# Allegro board Sensor.brd
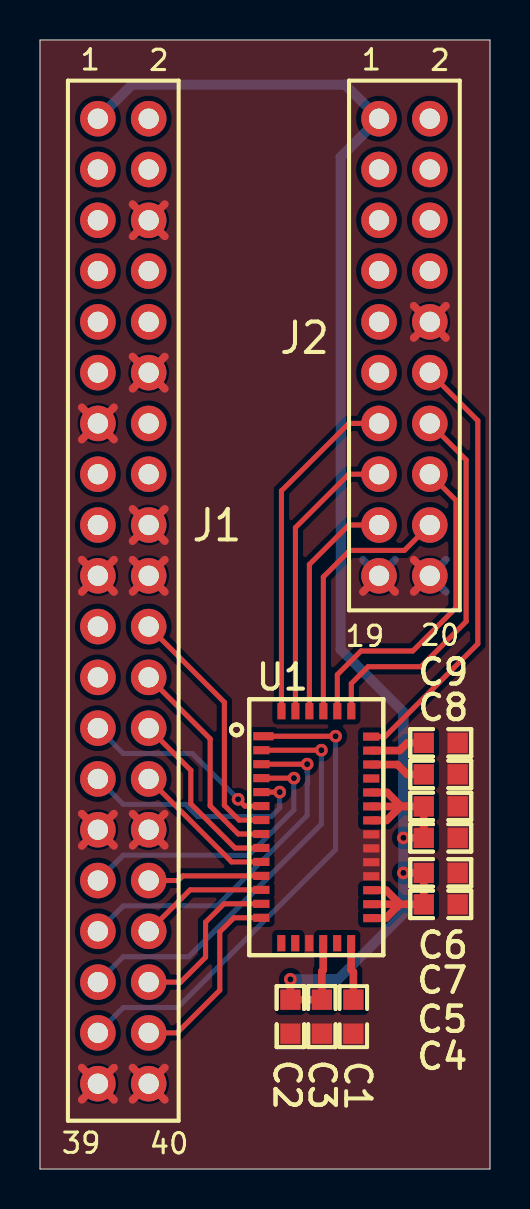
[diagram p0: board, top side]
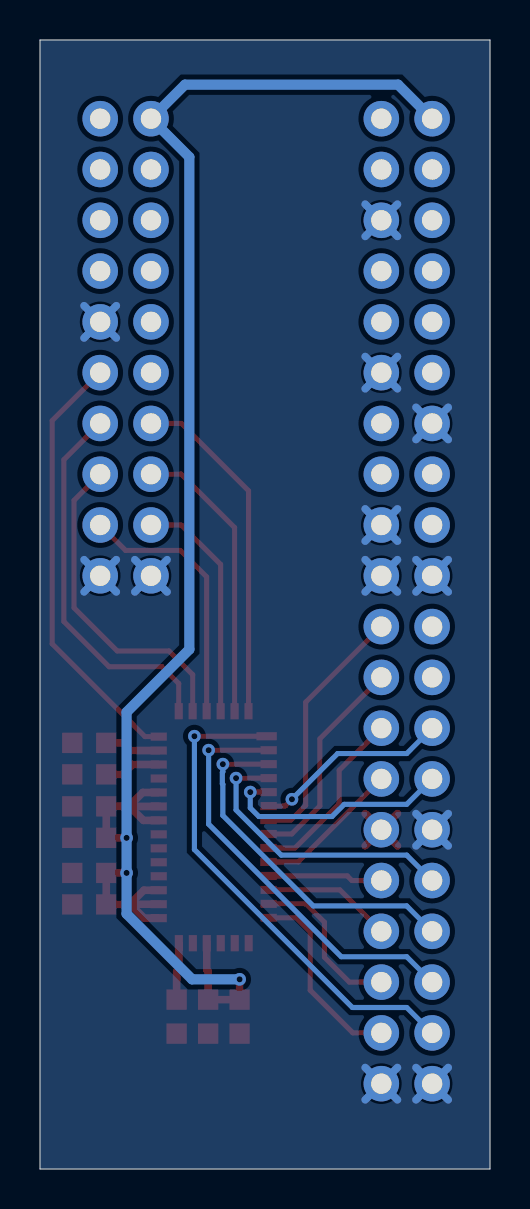
[diagram p1: board, bottom side, seen from below]

Outline 22.5 x 56.46 mm; copper layers: TOP, BOTTOM. Coordinates in mm from the lower left corner of the outline.
Outline path: 0,56.46 0,0 22.5,0 22.5,56.46 0,56.46

## Design rules (mm)
constraint set DEFAULT: min track width 0.127

## Placement (name value [footprint] x y rotation side)
C1  1uF  [0603]  15.67 7.62 270 top
C2  1uF  [0603]  12.52 7.62 270 top
C3  100nF  [0603]  14.1 7.62 270 top
C4  1uF  [0603]  20.04 13.23 0 top
C5  100nF  [0603]  20.04 14.81 0 top
C6  1uF  [0603]  20.04 18.14 0 top
C7  100nF  [0603]  20.04 16.56 0 top
C8  1uF  [0603]  20.04 19.74 0 top
C9  1uF  [0603]  20.04 21.31 0 top
J1  Header-Female-2.54_2x20  [HDR2X20]  2.9 52.53 0 top
J2  Header-Male-2.54_2x10  [HDR2X10]  16.95 52.53 0 top
U1  S15611  [S15611_FP]  13.82 17.09 270 top

## Library data of the parts
C1-C9 = CAPACITOR NON-POL
J1 = HEADER 20X2
J2 = HEADER 10X2
U1 = S15611

## Footprints (pads in the part's own frame, mm; a bottom-side part is the same pattern mirrored in y, then rotated)
0603
  rect 1.016x1.016 smd: 1(-0.85,0) 2(0.85,0)
HDR2X10
  round 1.778 hole 1.016: 1(0,0) 2(2.54,0) 3(0,-2.54) 4(2.54,-2.54) 5(0,-5.08) 6(2.54,-5.08) 7(0,-7.62) 8(2.54,-7.62) 9(0,-10.16) 10(2.54,-10.16) 11(0,-12.7) 12(2.54,-12.7) 13(0,-15.24) 14(2.54,-15.24) 15(0,-17.78) 16(2.54,-17.78) 17(0,-20.32) 18(2.54,-20.32) 19(0,-22.86) 20(2.54,-22.86)
HDR2X20
  round 1.778 hole 1.016: 1(0,0) 2(2.54,0) 3(0,-2.54) 4(2.54,-2.54) 5(0,-5.08) 6(2.54,-5.08) 7(0,-7.62) 8(2.54,-7.62) 9(0,-10.16) 10(2.54,-10.16) 11(0,-12.7) 12(2.54,-12.7) 13(0,-15.24) 14(2.54,-15.24) 15(0,-17.78) 16(2.54,-17.78) 17(0,-20.32) 18(2.54,-20.32) 19(0,-22.86) 20(2.54,-22.86) 21(0,-25.4) 22(2.54,-25.4) 23(0,-27.94) 24(2.54,-27.94) 25(0,-30.48) 26(2.54,-30.48) 27(0,-33.02) 28(2.54,-33.02) 29(0,-35.56) 30(2.54,-35.56) 31(0,-38.1) 32(2.54,-38.1) 33(0,-40.64) 34(2.54,-40.64) 35(0,-43.18) 36(2.54,-43.18) 37(0,-45.72) 38(2.54,-45.72) 39(0,-48.26) 40(2.54,-48.26)
S15611_FP
  rect 0.406x1.016 smd: 1(-4.549,-2.647)
  rect 0.406x0.813 smd: 2(-3.851,-2.748) 3(-3.152,-2.748) 4(-2.454,-2.748) 5(-1.755,-2.748) 6(-1.057,-2.748) 7(-0.358,-2.748) 8(0.34,-2.748) 9(1.039,-2.748) 10(1.737,-2.748) 11(2.436,-2.748) 12(3.134,-2.748) 13(3.833,-2.748) 14(4.531,-2.748) 21(4.549,2.748) 22(3.851,2.748) 23(3.152,2.748) 24(2.454,2.748) 25(1.755,2.748) 26(1.057,2.748) 27(0.358,2.748) 28(-0.34,2.748) 29(-1.039,2.748) 30(-1.737,2.748) 31(-2.436,2.748) 32(-3.134,2.748) 33(-3.833,2.748) 34(-4.531,2.748)
  rect 0.813x0.406 smd: 15(5.801,-1.75) 16(5.801,-1.052) 17(5.801,-0.353) 18(5.801,0.345) 19(5.801,1.044) 20(5.801,1.742) 35(-5.801,1.75) 36(-5.801,1.052) 37(-5.801,0.353) 38(-5.801,-0.345) 39(-5.801,-1.044) 40(-5.801,-1.742)

## Nets
GND: C1.2 C2.2 C3.2 C4.2 C5.2 C6.2 C7.2 C8.2 C9.2 J1.6 J1.12 J1.13 J1.18 J1.19 J1.20 J1.29 J1.30 J1.39 J1.40 J2.10 J2.19 J2.20 U1.17 U1.24 U1.25 U1.26 U1.27
VCC: C2.1 C3.1 C4.1 C5.1 C6.1 C7.1 J1.1 J2.1 U1.18 U1.21 U1.22 U1.23 U1.28 U1.29 U1.30
N00663: J1.22 U1.7
N00667: J1.24 U1.8
N00671: J1.26 U1.9
N00675: J1.28 U1.10
N00679: J1.32 U1.11
N00691: J1.34 U1.12
N00703: J1.36 U1.13
N00715: J1.38 U1.14
N01605: J1.37 U1.1
N01630: J1.35 U1.2
N01661: J1.33 U1.3
N01686: J1.31 U1.4
N01735: J1.27 U1.5
N01767: J1.25 U1.6
N02645: J2.13 U1.40
N02663: J2.15 U1.39
N02681: J2.17 U1.38
N02714: J2.18 U1.37
N02732: J2.16 U1.36
N02750: J2.14 U1.35
N04742: J2.12 U1.34
N04808: C8.1 U1.32
N04814: C9.1 U1.33
N0037119: C1.1 U1.20(V_REF)

Pads without a net: J1 2 3 4 5 7 8 9 10 11 14 15 16 17 21 23; J2 2 3 4 5 6 7 8 9 11; U1 15 16 19 31

## Via types
v1: diameter 0.635, hole 0.305, TOP to BOTTOM, 9 vias

## Routing (per net, layer and track width the routed paths; a pad name or vN(x,y) marks a point on that pad's centre or on a via; arc(x,y) is an arc through that point)
GND: length 109.3
  TOP w0.381: J1.29 3.7,16.16 ; J1.29 3.7,17.77 ; J1.29 2.09,17.77 ; J1.29 2.09,16.16 ; J1.12 6.24,39.02 ; J1.12 4.63,39.02 ; J1.12 4.63,40.63 ; J1.12 6.24,40.63 ; 2.09,3.46 J1.39 ; J1.39 3.7,5.07 ; J1.39 3.7,3.46 ; J1.39 2.09,5.07 ; 4.63,28.86 J1.20 ; J1.20 6.24,28.86 ; J1.20 4.63,30.47 ; J1.20 6.24,30.47 ; J2.10 20.3,41.56 ; J2.10 20.3,43.17 ; J2.10 18.69,41.56 ; J2.10 18.69,43.17 ; 4.63,48.25 J1.6 ; J1.6 4.63,46.64 ; J1.6 6.24,46.64 ; J1.6 6.24,48.25 ; 18.69,30.47 J2.20 18.69,28.86 ; J1.13 3.7,36.48 ; J1.13 3.7,38.09 ; J1.13 2.09,38.09 ; J1.13 2.09,36.48 ; 4.63,31.4 J1.18 ; J1.18 6.24,31.4 ; J1.18 6.24,33.01 ; J1.18 4.63,33.01 ; 4.63,16.16 J1.30 ; J1.30 6.24,17.77 ; J1.30 4.63,17.77 ; J1.30 6.24,16.16 ; 16.15,28.86 J2.19 17.76,28.86 ; 4.63,5.07 J1.40 ; J1.40 6.24,5.07 ; J1.40 4.63,3.46 ; J1.40 6.24,3.46 ; 2.09,28.86 J1.19 ; J1.19 2.09,30.47 ; J1.19 3.7,30.47 ; J1.19 3.7,28.86
  BOTTOM w0.381: J1.18 6.24,33.01 ; J1.18 6.24,31.4 ; J1.18 4.63,31.4 ; J1.18 4.63,33.01 ; 16.15,28.86 J2.19 ; J2.19 17.76,28.86 ; J2.19 16.15,30.47 ; J2.19 17.76,30.47 ; J1.12 6.24,40.63 ; J1.12 6.24,39.02 ; J1.12 4.63,39.02 ; J1.12 4.63,40.63 ; 4.63,46.64 J1.6 ; J1.6 6.24,48.25 ; J1.6 4.63,48.25 ; J1.6 6.24,46.64 ; 4.63,3.46 J1.40 ; J1.40 6.24,3.46 ; J1.40 4.63,5.07 ; J1.40 6.24,5.07 ; J1.19 3.7,30.47 ; J1.19 2.09,30.47 ; J1.19 2.09,28.86 ; J1.19 3.7,28.86 ; 2.09,3.46 J1.39 ; J1.39 3.7,5.07 ; J1.39 2.09,5.07 ; J1.39 3.7,3.46 ; 18.69,41.56 J2.10 ; J2.10 20.3,41.56 ; J2.10 18.69,43.17 ; J2.10 20.3,43.17 ; 2.09,36.48 J1.13 ; J1.13 3.7,36.48 ; J1.13 3.7,38.09 ; J1.13 2.09,38.09 ; 4.63,30.47 J1.20 ; J1.20 6.24,28.86 ; J1.20 6.24,30.47 ; J1.20 4.63,28.86 ; J1.29 3.7,17.77 ; J1.29 3.7,16.16 ; J1.29 2.09,16.16 ; J1.29 2.09,17.77 ; J2.20 20.3,30.47 ; J2.20 18.69,28.86 ; J2.20 18.69,30.47 ; J2.20 20.3,28.86
VCC: length 87.5
  TOP w0.381: 18.01,13.24 18.36,13.24 18.37,13.23 C4.1 C5.1 v1(18.17,14.81) ; 18.01,13.24 17.31,13.94 U1.23 ; 18.01,13.24 17.99,13.24 ; 17.99,13.24 17.29,12.55 U1.21 ; 17.99,13.24 U1.22 ; v1(18.17,16.56) C7.1 C6.1 18.37,18.14 ; 18.03,18.13 18.36,18.13 18.37,18.14 ; 18.03,18.13 17.33,17.43 U1.28 ; 18.03,18.13 U1.29 ; U1.30 17.36,18.83 18.06,18.14 18.37,18.14 ; U1.18 14.16,9.95 14.1,9.88 C3.1 C2.1 v1(12.52,9.49)
  BOTTOM w0.508: J1.1 4.6,54.23 15.25,54.23 J2.1 15.04,50.61 15.04,25.98 18.17,22.85 v1(18.17,16.56) v1(18.17,14.81) 18.17,12.76 14.9,9.49 v1(12.52,9.49)
N00663: length 12.7
  TOP w0.254: U1.7 9.95,17.45 9.22,18.19 9.22,23.34 J1.22
N00667: length 10.8
  TOP w0.254: U1.8 9.92,16.75 8.51,18.16 8.51,21.51 J1.24
N00671: length 9.1
  TOP w0.254: U1.9 9.75,16.06 7.54,18.26 7.54,19.94 J1.26
N00675: length 7.4
  TOP w0.254: J1.28 9.59,15.36 U1.10
N00679: length 5.7
  TOP w0.254: J1.32 6.91,14.43 7.14,14.66 U1.11
N00691: length 6.5
  TOP w0.254: U1.12 7.51,13.96 J1.34
N00703: length 8.3
  TOP w0.254: J1.36 7.04,9.35 8.28,10.59 8.28,12.34 9.2,13.26 U1.13
N00715: length 9.7
  TOP w0.254: J1.38 6.86,6.81 8.99,8.94 8.99,11.86 9.69,12.56 U1.14
N01605: length 25
  TOP w0.254: U1.1 v1(14.78,21.64)
  BOTTOM w0.254: J1.37 4.17,8.08 6.88,8.08 14.78,15.98 v1(14.78,21.64)
N01630: length 21.1
  TOP w0.254: U1.2 v1(14.07,20.94)
  BOTTOM w0.254: J1.35 4.17,10.62 7.44,10.62 14.07,17.25 v1(14.07,20.94)
N01661: length 17.7
  TOP w0.254: U1.3 v1(13.36,20.25)
  BOTTOM w0.254: J1.33 4.17,13.16 8.84,13.16 13.36,17.68 13.36,19.24 13.39,19.26 13.39,19.83 13.36,19.86 v1(13.36,20.25)
N01686: length 14.5
  TOP w0.254: U1.4 v1(12.7,19.55)
  BOTTOM w0.254: J1.31 4.17,15.7 10.44,15.7 12.7,17.96 v1(12.7,19.55)
N01735: length 11.8
  TOP w0.254: U1.5 v1(11.99,18.85)
  BOTTOM w0.254: J1.27 4.17,18.24 7.29,18.24 7.9,17.63 11.56,17.63 11.99,18.06 v1(11.99,18.85)
N01767: length 9.8
  TOP w0.254: v1(9.91,18.49) 10.25,18.15 U1.6
  BOTTOM w0.254: J1.25 4.17,20.78 7.62,20.78 v1(9.91,18.49)
N02645: length 17.3
  TOP w0.254: U1.40 12.08,33.92 15.44,37.29 J2.13
N02663: length 14.5
  TOP w0.254: J2.15 15.44,34.75 12.77,32.08 U1.39
N02681: length 11.6
  TOP w0.254: U1.38 13.47,30.24 15.44,32.21 J2.17
N02714: length 13.1
  TOP w0.254: U1.37 14.17,29.61 15.49,30.94 18.22,30.94 J2.18
N02732: length 16.4
  TOP w0.254: J2.16 20.8,33.44 20.8,28.07 18.64,25.91 16.05,25.91 14.87,24.72 U1.36
N02750: length 19.1
  TOP w0.254: U1.35 15.57,24.28 16.41,25.12 19.05,25.12 21.31,27.38 21.31,35.47 J2.14
N04742: length 21.8
  TOP w0.254: U1.34 17.26,21.63 21.89,26.26 21.89,37.43 J2.12
N04808: length 2.8
  TOP w0.381: U1.32 17.87,20.23 18.37,19.74 C8.1
N04814: length 2.8
  TOP w0.381: U1.33 17.98,20.93 18.37,21.31 C9.1
N0037119: length 2.9
  TOP w0.381: U1.20 15.56,9.97 15.67,9.86 C1.1

## Copper pours and planes (outline as drawn; the poured copper is in the pictures)
GND on TOP: 0,56.46 0,0 22.5,0 22.5,56.46 ; 3 cut-outs
GND on BOTTOM: 0.03,44.39 0.03,44.35 0,44.35 0,0 22.5,0 22.5,56.46 0,56.46 0,44.39
